# EAGLE board I2C-LLC Mk 01 (EAGLE 7.6.0)
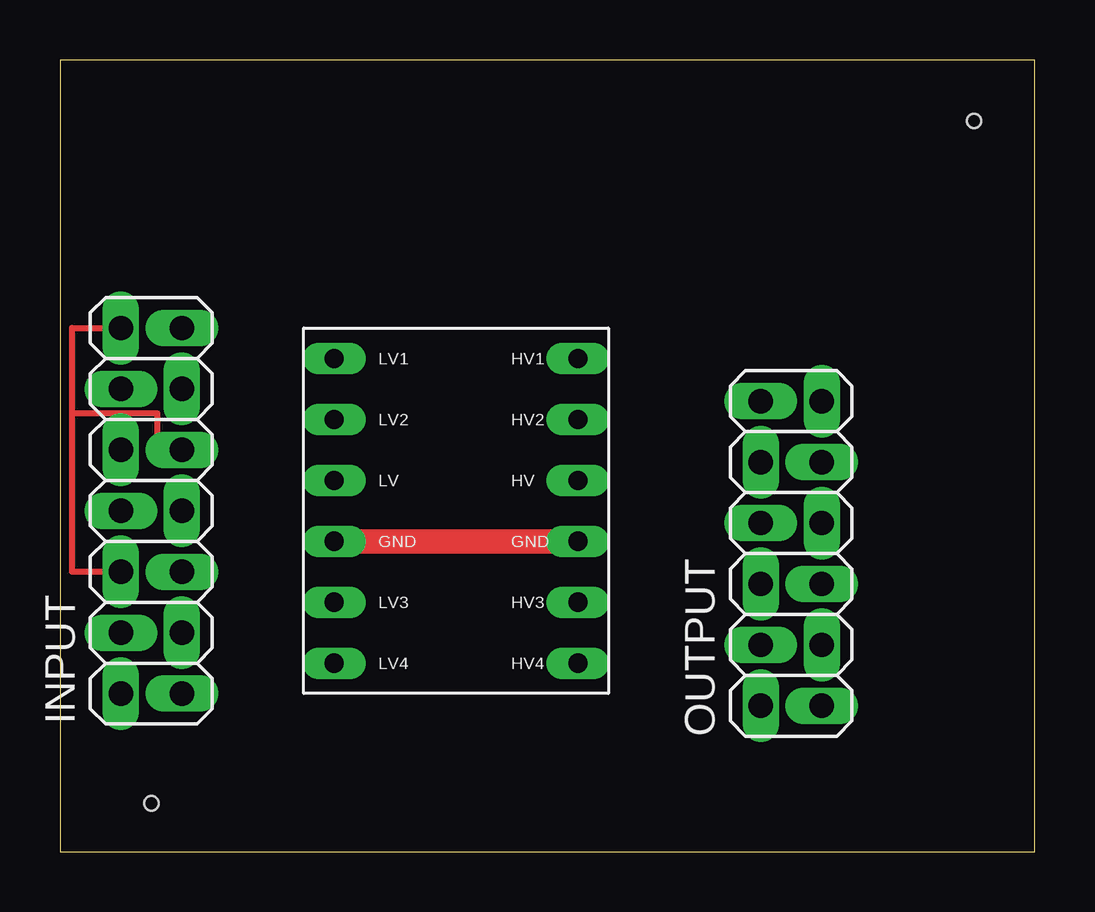
[diagram p0: board, top side]
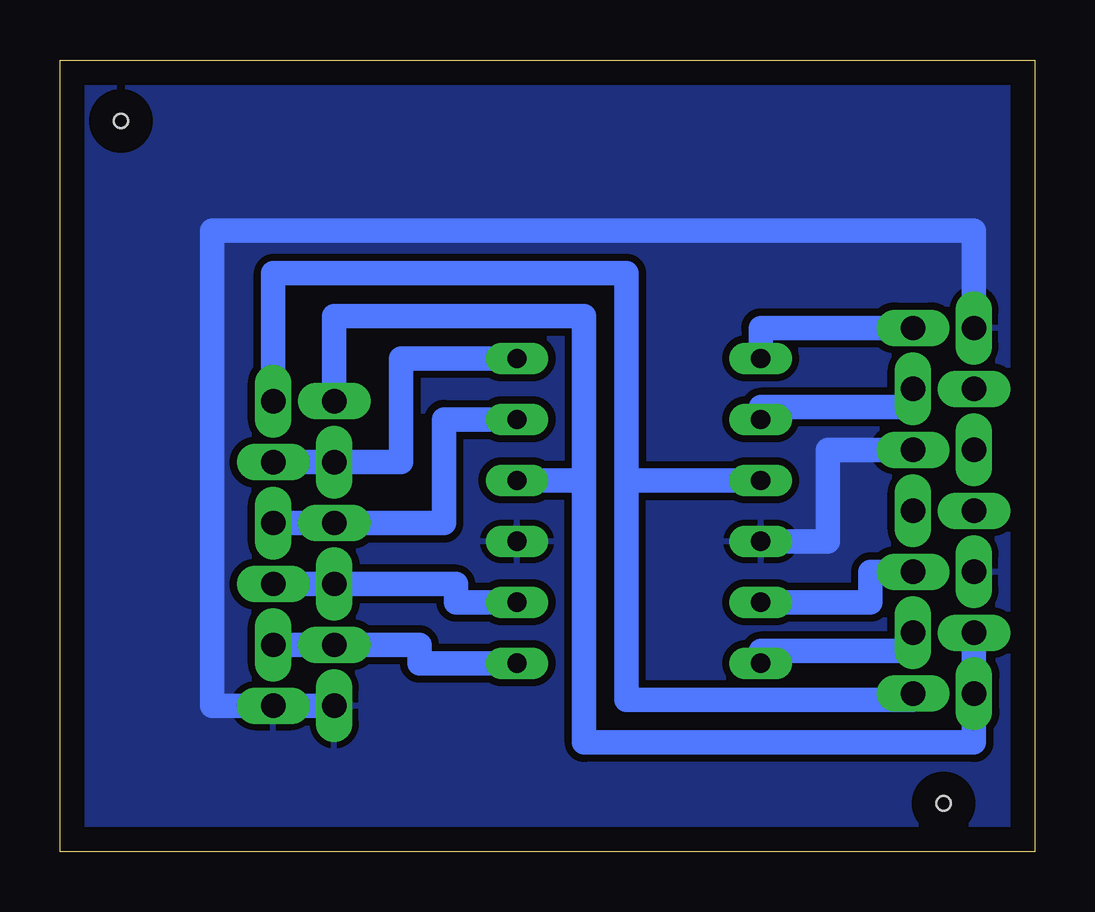
[diagram p1: board, bottom side, seen from below]

Size 40.64 x 33.02 mm. Coordinates in mm from the lower left corner, seen from the top.
Outline: 0,0 40.64,0 40.64,33.02 0,33.02 0,0
Copper layers (1*16): Top 0.035mm / dielectric 1.5mm / Bottom 0.035mm
Design rules "default *": minimum track width 10mil, minimum drill 24mil, track to track 12mil, track to pad 12mil, pad to pad 12mil, via to via 12mil, smd to smd 12mil, copper to edge 40mil, drill to drill 12mil, minimum pad ring 10mil, minimum via ring 8mil, stop-mask expansion 4mil, vias tented up to drill 0mil, thermal gap 10mil
Holes 0.6 mm at 38.1,30.48 3.81,2.03

## Footprints (pad centres in the part's own frame; a part is rotated, then mirrored left to right if it is on the bottom)
2X07 = drill 1.016 long: 1 -7.62,-1.27; 2 -7.62,1.27; 3 -5.08,-1.27; 4 -5.08,1.27; 5 -2.54,-1.27; 6 -2.54,1.27; 7 0,-1.27; 8 0,1.27; 9 2.54,-1.27; 10 2.54,1.27; 11 5.08,-1.27; 12 5.08,1.27; 13 7.62,-1.27; 14 7.62,1.27
2X06 = drill 1.016 long: 1 -6.35,-1.27; 2 -6.35,1.27; 3 -3.81,-1.27; 4 -3.81,1.27; 5 -1.27,-1.27; 6 -1.27,1.27; 7 1.27,-1.27; 8 1.27,1.27; 9 3.81,-1.27; 10 3.81,1.27; 11 6.35,-1.27; 12 6.35,1.27
BD-LLC = drill 0.8 long: GND1 1.27,6.35; GND2 11.43,6.35; HV1 11.43,13.97; HV2 11.43,11.43; HV3 11.43,3.81; HV4 11.43,1.27; HV_IN 11.43,8.89; LV1 1.27,13.97; LV2 1.27,11.43; LV3 1.27,3.81; LV4 1.27,1.27; LV_IN 1.27,8.89

## Placement (x,y rotation side)
INPUT  [2X07]  3.81,14.22 90 top
OUTPUT  [2X06]  30.48,12.45 90 top
U$1  BD-LLC  [BD-LLC]  10.16,6.6 0 top

## Library data of the parts
INPUT OUTPUT = pinhead - big pad
U$1 = Sparkfun

## Nets
+3V3: INPUT.1 OUTPUT.11 U$1.LV_IN
+5V: INPUT.2 INPUT.4 OUTPUT.12 U$1.HV_IN
EX1_H: OUTPUT.7 OUTPUT.8 U$1.HV2
EX1_L: INPUT.11 U$1.LV2
EX2_H: OUTPUT.9 OUTPUT.10 U$1.HV1
EX2_L: INPUT.13 U$1.LV1
GND: INPUT.6 INPUT.9 INPUT.14 OUTPUT.1 OUTPUT.2 U$1.GND1 U$1.GND2
SCK_H: OUTPUT.5 OUTPUT.6 U$1.HV3
SCK_L: INPUT.5 U$1.LV3
SDA_H: OUTPUT.3 OUTPUT.4 U$1.HV4
SDA_L: INPUT.3 U$1.LV4

## Tracks (layer width: path | path; a pad name or v marks a point on that pad's centre or on a via)
+3V3
  Bottom 1.016: INPUT.1 5.08,6.35 17.02,6.35 17.02,15.49 | 17.02,15.49 U$1.LV_IN | OUTPUT.11 31.75,24.13 17.02,24.13 17.02,15.49
+5V
  Bottom 1.016: 18.8,15.49 18.8,4.57 2.54,4.57 INPUT.2 INPUT.4 | 18.8,15.49 U$1.HV_IN | OUTPUT.12 29.21,22.35 18.8,22.35 18.8,15.49
EX1_H
  Bottom 1.016: OUTPUT.7 OUTPUT.8 24.64,13.72 24.64,18.03 U$1.HV2
EX1_L
  Bottom 1.016: INPUT.11 5.08,18.54 11.43,18.54 U$1.LV2
EX2_H
  Bottom 1.016: U$1.HV1 26.42,20.57 26.42,16.26 OUTPUT.10 OUTPUT.9
EX2_L
  Bottom 1.016: INPUT.13 11.43,21.84 U$1.LV1
GND
  Top 0.254: INPUT.9 4.06,16.76 4.06,18.29 0.51,18.29 | 0.51,18.29 0.51,21.84 INPUT.14 | INPUT.6 0.51,11.68 0.51,18.29
  Top 1.016: U$1.GND1 U$1.GND2
  Bottom 1.016: INPUT.9 8.64,16.76 8.64,12.95 U$1.GND1 | OUTPUT.1 OUTPUT.2 34.29,6.1 34.29,25.91 2.54,25.91 INPUT.14
  pour Bottom: 0,33.02 40.64,33.02 40.64,0 0,0
SCK_H
  Bottom 1.016: U$1.HV3 24.13,10.41 24.13,11.18 OUTPUT.6 OUTPUT.5
SCK_L
  Bottom 1.016: INPUT.5 6.86,11.68 6.86,10.41 U$1.LV3
SDA_H
  Bottom 1.016: U$1.HV4 25.65,7.87 25.65,8.64 OUTPUT.4 OUTPUT.3
SDA_L
  Bottom 1.016: INPUT.3 5.08,8.38 11.43,8.38 U$1.LV4